# EAGLE board MachineLearning-MM-Carrier-Panel (EAGLE 9.5.2), part 1 of 4
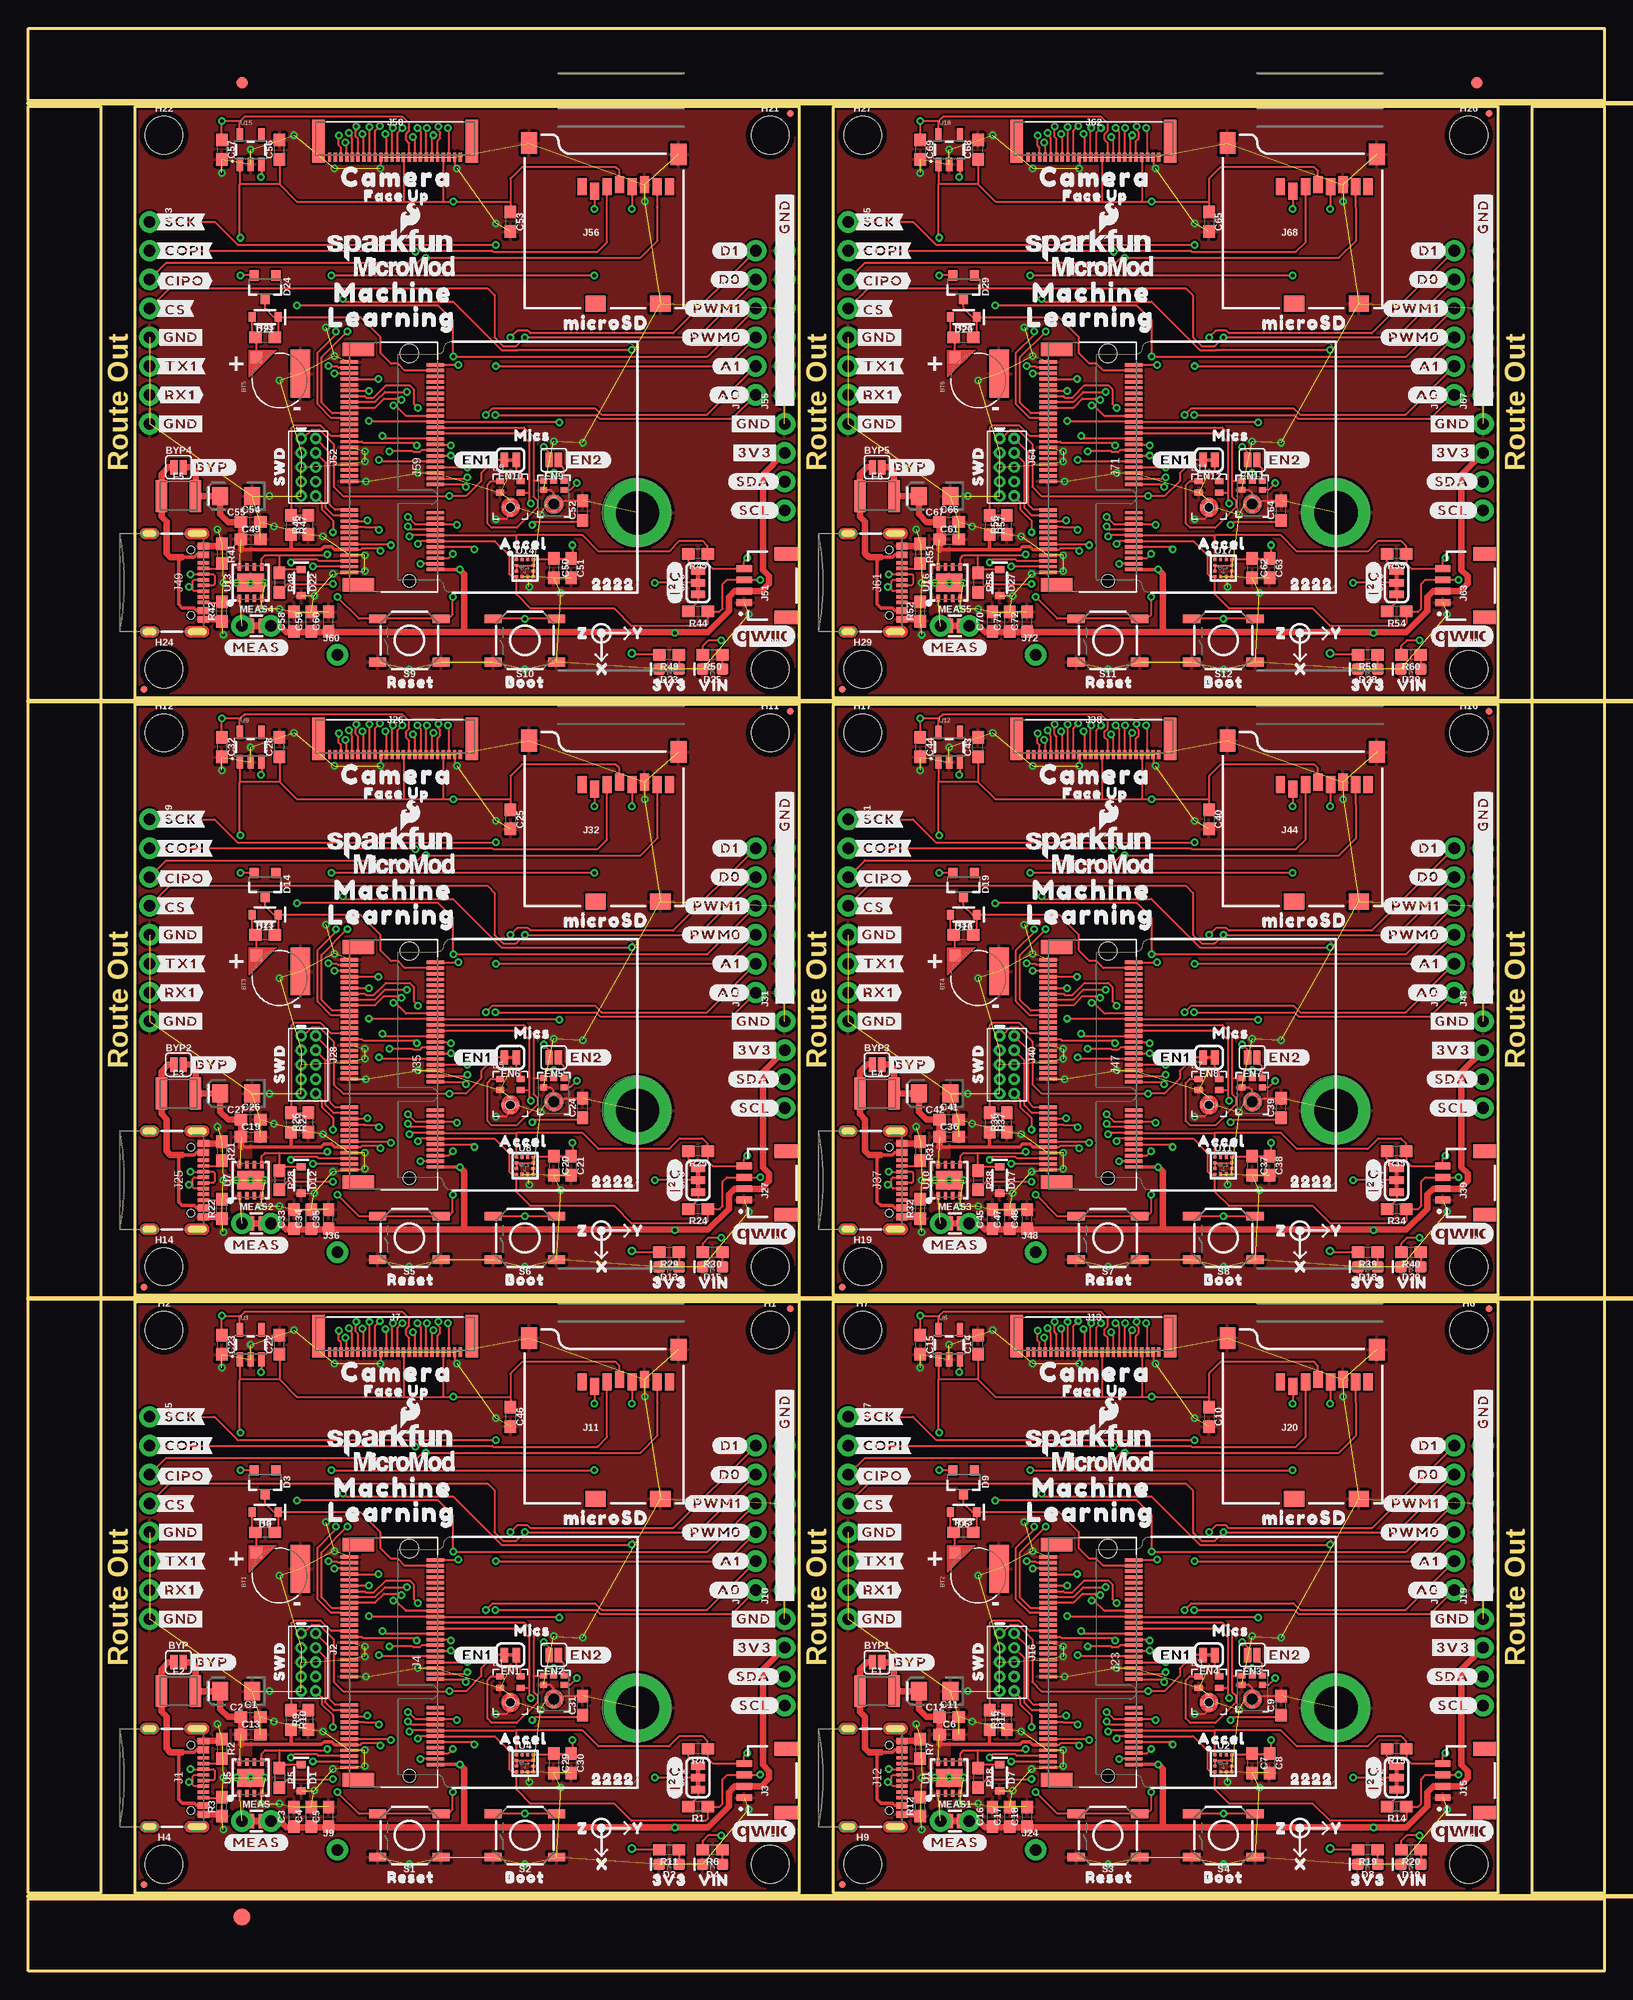
[diagram p0: board, top side]
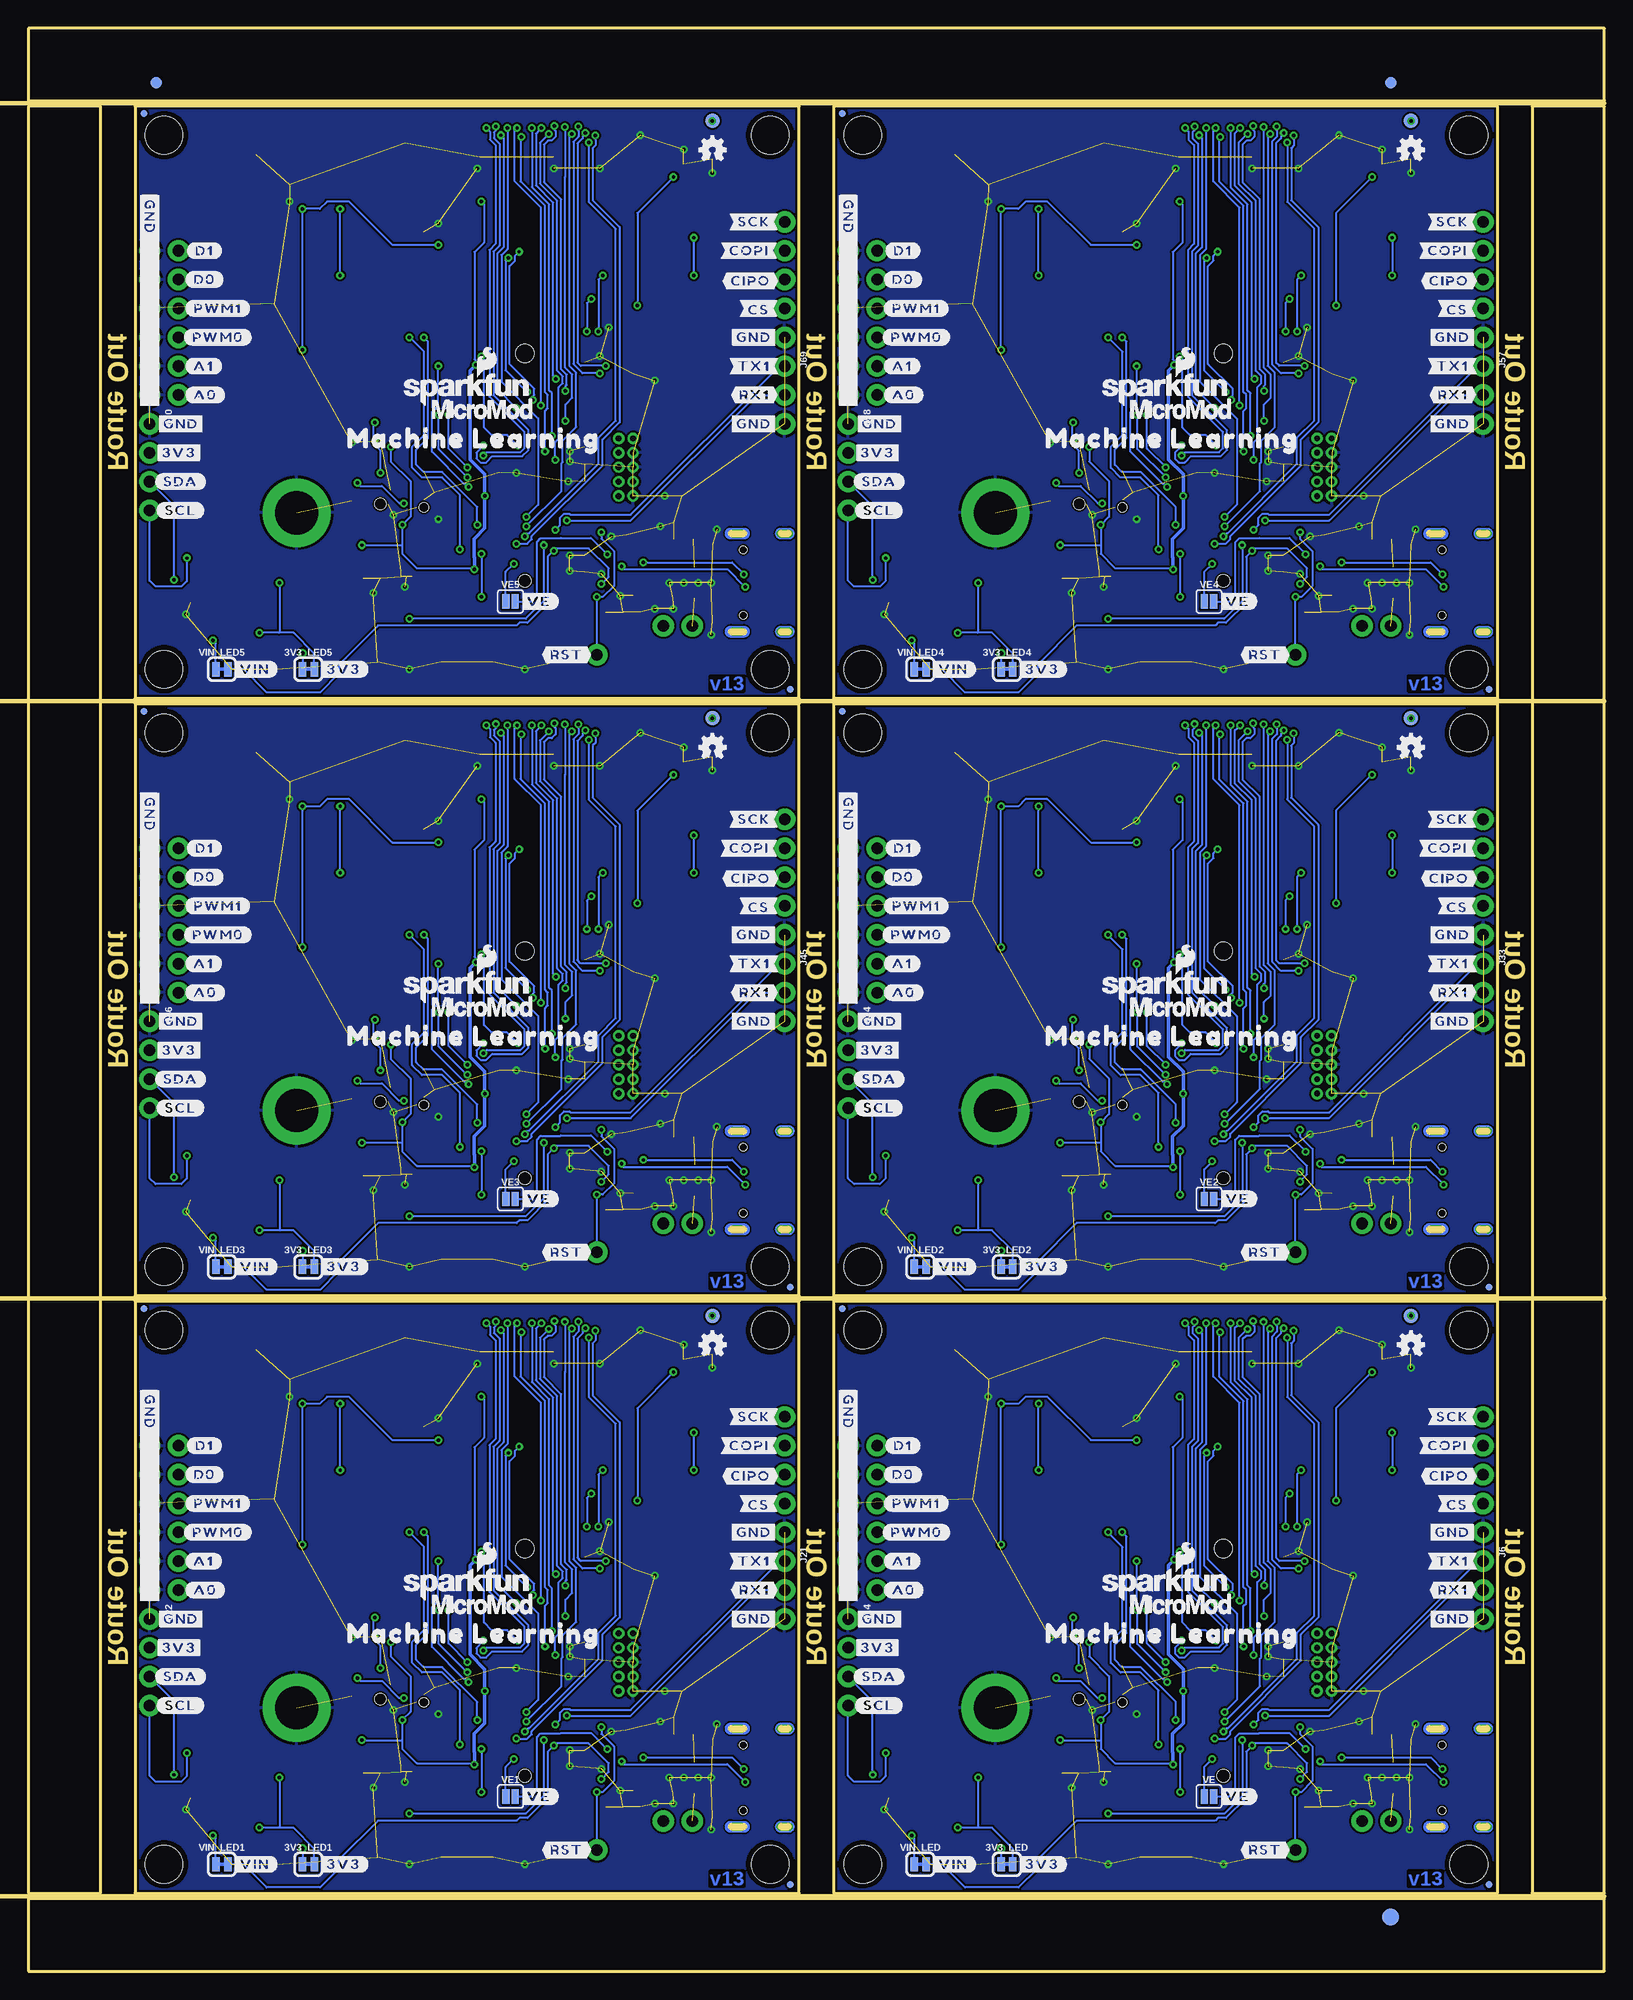
[diagram p1: board, bottom side, seen from below]

Size 138.68 x 170.94 mm. Coordinates in mm from the lower left corner, seen from the top.
Outline: 9.4,6.86 9.4,58.93 67.82,58.93 67.82,6.86 9.4,6.86
Outline: 70.87,6.86 70.87,58.93 129.29,58.93 129.29,6.86 70.87,6.86
Outline: 9.4,59.44 9.4,111.51 67.82,111.51 67.82,59.44 9.4,59.44
Outline: 70.87,59.44 70.87,111.51 129.29,111.51 129.29,59.44 70.87,59.44
Outline: 9.4,112.01 9.4,164.08 67.82,164.08 67.82,112.01 9.4,112.01
Outline: 70.87,112.01 70.87,164.08 129.29,164.08 129.29,112.01 70.87,112.01
Outline: 0,6.35 138.68,6.35 138.68,0 0,0 0,6.35
Outline: 132.33,164.08 138.68,164.08 138.68,6.86 132.33,6.86 132.33,164.08
Outline: 0,170.94 138.68,170.94 138.68,164.59 0,164.59 0,170.94
Outline: 0,164.08 6.35,164.08 6.35,6.86 0,6.86 0,164.08
Copper layers (1*16): Top 0.035mm / dielectric 1.5mm / Bottom 0.035mm
Design rules "MachineLearning-MM-Carrier": minimum track width 7mil, minimum drill 12mil, track to track 7mil, track to pad 7mil, pad to pad 7mil, via to via 7mil, smd to smd 7mil, copper to edge 7mil, drill to drill 7mil, minimum pad ring 7mil, minimum via ring 7mil, stop-mask expansion 4mil, vias tented up to drill 25mil, thermal gap 10mil
Net classes: 0 default: width 0 mm, drill 0 mm
Milling: 4 lines

## Footprints (pad centres in the part's own frame; a part is rotated, then mirrored left to right if it is on the bottom)
SMT-JUMPER_2_NC_TRACE_SILK = smd 0.66 x 1.27: 1 -0.521,0; 2 0.521,0
ML414H_IV01E = smd 1 x 1: + 2.022,2.032 | smd 4.2 x 1.7: - 0.6,-1.85
SMT-JUMPER_2_NO_SILK = smd 0.635 x 1.27: 1 -0.406,0; 2 0.406,0
0603 = smd 1.1 x 1: 1 -0.85,0; 2 0.85,0
EIA3216 = smd 1.4 x 1.6: + 1.4,0; - -1.4,0
SOD-323 = smd 0.63 x 0.83: A 1.15,0; C -1.15,0
LED-0603 = smd 1 x 1: A -0.877,0; C 0.877,0
SOT23-3 = smd 0.8 x 0.9: 1 -0.95,-1; 2 0.95,-1; 3 0,1.1
SPH0641LM4H-1_MICROPHONE = smd 0.725 x 0.522: 1 -0.9,1.3; 2 -0.9,0.3; 4 0.9,0.3; 5 0.9,1.3 | smd 0.5 x 0.2: 3 0,-1.65; 8 0,-0.35 | smd 0.2 x 0.5: 6 -0.65,-1; 7 0.65,-1 | hole 0.8: 0,-1
ICS-43434 = smd 0.522 x 0.6: 1 -1.364,-0.9; 2 -0.542,-0.9; 4 -0.542,0.9; 5 -1.364,0.9; 6 -1.364,0 | smd 0.2 x 0.5: 3 1.36,0; 8 0.06,0 | smd 0.5 x 0.2: 7 0.71,0.65; 9 0.71,-0.65 | hole 1: 0.71,0
FIDUCIAL-1X2 = smd 1 x 1: 1 0,0
FIDUCIAL-1.5X3 = smd 1.5 x 1.5: 1 0,0
1210 = smd 1 x 2.8: 1 -1.5,0; 2 1.5,0
FIDUCIAL-MICRO = smd 0.635 x 0.635: 1 0,0
STAND-OFF = hole 3.302: 0,0
STAND-OFF-REFLOW-M2.5 = drill 3.8 pad 6: 1 0,0
USB-C-16P-2LAYER-PADS = smd 0.3 x 1: A5 -1.25,-0.34; A6 -0.25,-0.34; A7 0.25,-0.34; A8 1.25,-0.34; B5 1.75,-0.34; B6 0.75,-0.34; B7 -0.75,-0.34; B8 -1.75,-0.34 | smd 0.6 x 1: GND -3.225,-0.34; GND2 3.225,-0.34; VBUS1 -2.45,-0.34; VBUS2 2.45,-0.34 | drill 0.4 pad 0.6 long: SHLD1 -4.318,-0.915; SHLD2 4.318,-0.915; SHLD3 -4.318,-5.095; SHLD4 4.318,-5.095 | hole 0.65: -2.89,-1.445; 2.89,-1.445
2X5-PTH-1.27MM = drill 0.508 pad 1: 1 -2.54,-0.635; 2 -2.54,0.635; 3 -1.27,-0.635; 4 -1.27,0.635; 5 0,-0.635; 6 0,0.635; 7 1.27,-0.635; 8 1.27,0.635; 9 2.54,-0.635; 10 2.54,0.635
JST04_1MM_RA = smd 0.6 x 1.35: 1 -1.5,0; 2 -0.5,0; 3 0.5,0; 4 1.5,0 | smd 1.2 x 2: NC1 2.8,-3.675; NC2 -2.8,-3.675
M.2-CONNECTOR-E = smd 0.3 x 1.55: 1 9.25,-5.275; 2 9,2.275; 3 8.75,-5.275; 4 8.5,2.275; 5 8.25,-5.275; 6 8,2.275; 7 7.75,-5.275; 8 7.5,2.275; 9 7.25,-5.275; 10 7,2.275; 11 6.75,-5.275; 12 6.5,2.275; 13 6.25,-5.275; 14 6,2.275; 15 5.75,-5.275; 16 5.5,2.275; 17 5.25,-5.275; 18 5,2.275; 19 4.75,-5.275; 20 4.5,2.275; 21 4.25,-5.275; 22 4,2.275; 23 3.75,-5.275; 32 1.5,2.275; 33 1.25,-5.275; 34 1,2.275; 35 0.75,-5.275; 36 0.5,2.275; 37 0.25,-5.275; 38 0,2.275; 39 -0.25,-5.275; 40 -0.5,2.275; 41 -0.75,-5.275; 42 -1,2.275; 43 -1.25,-5.275; 44 -1.5,2.275; 45 -1.75,-5.275; 46 -2,2.275; 47 -2.25,-5.275; 48 -2.5,2.275; 49 -2.75,-5.275; 50 -3,2.275; 51 -3.25,-5.275; 52 -3.5,2.275; 53 -3.75,-5.275; 54 -4,2.275; 55 -4.25,-5.275; 56 -4.5,2.275; 57 -4.75,-5.275; 58 -5,2.275; 59 -5.25,-5.275; 60 -5.5,2.275; 61 -5.75,-5.275; 62 -6,2.275; 63 -6.25,-5.275; 64 -6.5,2.275; 65 -6.75,-5.275; 66 -7,2.275; 67 -7.25,-5.275; 68 -7.5,2.275; 69 -7.75,-5.275; 70 -8,2.275; 71 -8.25,-5.275; 72 -8.5,2.275; 73 -8.75,-5.275; 74 -9,2.275; 75 -9.25,-5.275 | smd 1.2 x 2.75: A1 10.35,-4.5; A2 -10.35,-4.5 | hole 1.1: 10,0 | hole 1.6: -10,0
1X05_NO_SILK = drill 1.016 pad 1.88: 1 0,0; 2 2.54,0; 3 5.08,0; 4 7.62,0; 5 10.16,0
1X03_NO_SILK = drill 1.016 pad 1.88: 1 0,0; 2 2.54,0; 3 5.08,0
FPC05024-42201 = smd 0.3 x 0.8: 1 5.75,0.4; 2 5.25,0.4; 3 4.75,0.4; 4 4.25,0.4; 5 3.75,0.4; 6 3.25,0.4; 7 2.75,0.4; 8 2.25,0.4; 9 1.75,0.4; 10 1.25,0.4; 11 0.75,0.4; 12 0.25,0.4; 13 -0.25,0.4; 14 -0.75,0.4; 15 -1.25,0.4; 16 -1.75,0.4; 17 -2.25,0.4; 18 -2.75,0.4; 19 -3.25,0.4; 20 -3.75,0.4; 21 -4.25,0.4; 22 -4.75,0.4; 23 -5.25,0.4; 24 -5.75,0.4 | smd 1.1 x 3.75: MNT1 -6.75,-1; MNT2 6.75,-1
1X06_NO_SILK = drill 1.016 pad 1.88: 1 0,0; 2 2.54,0; 3 5.08,0; 4 7.62,0; 5 10.16,0; 6 12.7,0
1X01_NO_SILK = drill 1.016 pad 1.88: 1 0,0
MICRO-SD-SOCKET = smd 1.8 x 1.4: CD1 -2.05,0.4; CD2 -7.75,0.4 | smd 0.8 x 1.5: CS/DAT3 -7.84,10.3; DAT1 -1.24,10.7; DAT2 -8.94,10.7; DI/CMD -6.74,10.7; DO/DAT0 -2.34,10.7; GND -3.44,10.9; SCLK -4.54,10.7; VCC -5.64,10.9 | smd 1.4 x 1.9: GND1 -13.6,14.55; GND3 -0.45,13.55
1X04_NO_SILK = drill 1.016 pad 1.88: 1 0,0; 2 2.54,0; 3 5.08,0; 4 7.62,0
SMT-JUMPER_3_2-NC_TRACE_SILK = smd 0.66 x 1.27: 1 -1.041,0; 2 0,0; 3 1.041,0
COMBO-JUMPER_2_NC_TRACE = smd 0.635 x 1.27: 1 -0.508,0; 2 0.508,0 | drill 1.016 pad 1.88: 3 -1.27,0; 4 1.27,0
TACTILE_SWITCH_SMD_5.2MM = smd 1.524 x 0.762: 1 -2.794,1.905; 2 2.794,1.905; 3 -2.794,-1.905; 4 2.794,-1.905
PAD.03X.05 = smd 1.27 x 1.27: P$1 0,0
UDFN-8 = smd 0.3 x 0.65: 1 -0.975,-1.375; 2 -0.325,-1.375; 3 0.325,-1.375; 4 0.975,-1.375; 5 0.975,1.375; 6 0.325,1.375; 7 -0.325,1.375; 8 -0.975,1.375 | smd 2.35 x 1.6: EP 0,0
LGA-12-LISDH12 = smd 0.275 x 0.25: 1 -0.75,0.75; 2 -0.75,0.25; 3 -0.75,-0.25; 4 -0.75,-0.75; 7 0.75,-0.75; 8 0.75,-0.25; 9 0.75,0.25; 10 0.75,0.75 | smd 0.25 x 0.275: 5 -0.25,-0.75; 6 0.25,-0.75; 11 0.25,0.75; 12 -0.25,0.75
SOT23-5 = smd 0.55 x 1.2: 1 -0.95,-1.3; 2 0,-1.3; 3 0.95,-1.3; 4 0.95,1.3; 5 -0.95,1.3

## Placement (x,y rotation side)
3V3_LED  [SMT-JUMPER_2_NC_TRACE_SILK]  52.58,9.4 0 bottom
3V3_LED1  [SMT-JUMPER_2_NC_TRACE_SILK]  114.05,9.4 0 bottom
3V3_LED2  [SMT-JUMPER_2_NC_TRACE_SILK]  52.58,61.98 0 bottom
3V3_LED3  [SMT-JUMPER_2_NC_TRACE_SILK]  114.05,61.98 0 bottom
3V3_LED4  [SMT-JUMPER_2_NC_TRACE_SILK]  52.58,114.55 0 bottom
3V3_LED5  [SMT-JUMPER_2_NC_TRACE_SILK]  114.05,114.55 0 bottom
BT1  ML414H  [ML414H_IV01E]  22.1,34.8 90 top
BT2  ML414H  [ML414H_IV01E]  83.57,34.8 90 top
BT3  ML414H  [ML414H_IV01E]  22.1,87.38 90 top
BT4  ML414H  [ML414H_IV01E]  83.57,87.38 90 top
BT5  ML414H  [ML414H_IV01E]  22.1,139.95 90 top
BT6  ML414H  [ML414H_IV01E]  83.57,139.95 90 top
BYP  JUMPER-SMT_2_NO_SILK  [SMT-JUMPER_2_NO_SILK]  13.21,27.18 0 top
BYP1  JUMPER-SMT_2_NO_SILK  [SMT-JUMPER_2_NO_SILK]  74.68,27.18 0 top
BYP2  JUMPER-SMT_2_NO_SILK  [SMT-JUMPER_2_NO_SILK]  13.21,79.76 0 top
BYP3  JUMPER-SMT_2_NO_SILK  [SMT-JUMPER_2_NO_SILK]  74.68,79.76 0 top
BYP4  JUMPER-SMT_2_NO_SILK  [SMT-JUMPER_2_NO_SILK]  13.21,132.33 0 top
BYP5  JUMPER-SMT_2_NO_SILK  [SMT-JUMPER_2_NO_SILK]  74.68,132.33 0 top
C1  0.1uF  [0603]  19.56,22.35 0 top
C2  10uF  [EIA3216]  18.29,24.64 180 top
C3  1.0uF  [0603]  23.37,13.59 90 top
C4  0.1uF  [0603]  24.89,13.59 90 top
C5  0.22uF  [0603]  26.42,13.59 90 top
C6  0.22uF  [0603]  81.03,20.83 0 top
C7  1.0uF  [0603]  107.7,18.29 270 top
C8  0.1uF  [0603]  109.22,18.29 270 top
C9  0.1uF  [0603]  110.24,23.37 90 top
C10  0.1uF  [0603]  103.89,48.77 270 top
C11  0.1uF  [0603]  81.03,22.35 0 top
C12  10uF  [EIA3216]  79.76,24.64 180 top
C13  0.22uF  [0603]  19.56,20.83 0 top
C14  1.0uF  [0603]  83.57,55.12 90 top
C15  0.1uF  [0603]  78.49,55.12 270 top
C16  1.0uF  [0603]  84.84,13.59 90 top
C17  0.1uF  [0603]  86.36,13.59 90 top
C18  0.22uF  [0603]  87.88,13.59 90 top
C19  0.22uF  [0603]  19.56,73.41 0 top
C20  1.0uF  [0603]  46.23,70.87 270 top
C21  0.1uF  [0603]  47.75,70.87 270 top
C22  1.0uF  [0603]  22.1,55.12 90 top
C23  0.1uF  [0603]  17.02,55.12 270 top
C24  0.1uF  [0603]  48.77,75.95 90 top
C25  0.1uF  [0603]  42.42,101.35 270 top
C26  0.1uF  [0603]  19.56,74.93 0 top
C27  10uF  [EIA3216]  18.29,77.22 180 top
C28  1.0uF  [0603]  22.1,107.7 90 top
C29  1.0uF  [0603]  46.23,18.29 270 top
C30  0.1uF  [0603]  47.75,18.29 270 top
C31  0.1uF  [0603]  48.77,23.37 90 top
C32  0.1uF  [0603]  17.02,107.7 270 top
C33  1.0uF  [0603]  23.37,66.17 90 top
C34  0.1uF  [0603]  24.89,66.17 90 top
C35  0.22uF  [0603]  26.42,66.17 90 top
C36  0.22uF  [0603]  81.03,73.41 0 top
C37  1.0uF  [0603]  107.7,70.87 270 top
C38  0.1uF  [0603]  109.22,70.87 270 top
C39  0.1uF  [0603]  110.24,75.95 90 top
C40  0.1uF  [0603]  103.89,101.35 270 top
C41  0.1uF  [0603]  81.03,74.93 0 top
C42  10uF  [EIA3216]  79.76,77.22 180 top
C43  1.0uF  [0603]  83.57,107.7 90 top
C44  0.1uF  [0603]  78.49,107.7 270 top
C45  1.0uF  [0603]  84.84,66.17 90 top
C46  0.1uF  [0603]  42.42,48.77 270 top
C47  0.1uF  [0603]  86.36,66.17 90 top
C48  0.22uF  [0603]  87.88,66.17 90 top
C49  0.22uF  [0603]  19.56,125.98 0 top
C50  1.0uF  [0603]  46.23,123.44 270 top
C51  0.1uF  [0603]  47.75,123.44 270 top
C52  0.1uF  [0603]  48.77,128.52 90 top
C53  0.1uF  [0603]  42.42,153.92 270 top
C54  0.1uF  [0603]  19.56,127.51 0 top
C55  10uF  [EIA3216]  18.29,129.79 180 top
C56  1.0uF  [0603]  22.1,160.27 90 top
C57  0.1uF  [0603]  17.02,160.27 270 top
C58  1.0uF  [0603]  23.37,118.75 90 top
C59  0.1uF  [0603]  24.89,118.75 90 top
C60  0.22uF  [0603]  26.42,118.75 90 top
C61  0.22uF  [0603]  81.03,125.98 0 top
C62  1.0uF  [0603]  107.7,123.44 270 top
C63  0.1uF  [0603]  109.22,123.44 270 top
C64  0.1uF  [0603]  110.24,128.52 90 top
C65  0.1uF  [0603]  103.89,153.92 270 top
C66  0.1uF  [0603]  81.03,127.51 0 top
C67  10uF  [EIA3216]  79.76,129.79 180 top
C68  1.0uF  [0603]  83.57,160.27 90 top
C69  0.1uF  [0603]  78.49,160.27 270 top
C70  1.0uF  [0603]  84.84,118.75 90 top
C71  0.1uF  [0603]  86.36,118.75 90 top
C72  0.22uF  [0603]  87.88,118.75 90 top
D1  3.3V  [SOD-323]  24,17.02 270 top
D2  RED  [LED-0603]  56.39,9.4 180 top
D3  BAS70-05  [SOT23-3]  20.83,43.05 180 top
D4  Yellow  [LED-0603]  60.2,9.4 180 top
D5  3A/10V/280mV  [SOD-323]  82.3,40.39 180 top
D6  3A/10V/280mV  [SOD-323]  20.83,40.39 180 top
D7  3.3V  [SOD-323]  85.47,17.02 270 top
D8  RED  [LED-0603]  117.86,9.4 180 top
D9  BAS70-05  [SOT23-3]  82.3,43.05 180 top
D10  Yellow  [LED-0603]  121.67,9.4 180 top
D11  3A/10V/280mV  [SOD-323]  20.83,92.96 180 top
D12  3.3V  [SOD-323]  24,69.6 270 top
D13  RED  [LED-0603]  56.39,61.98 180 top
D14  BAS70-05  [SOT23-3]  20.83,95.63 180 top
D15  Yellow  [LED-0603]  60.2,61.98 180 top
D16  3A/10V/280mV  [SOD-323]  82.3,92.96 180 top
D17  3.3V  [SOD-323]  85.47,69.6 270 top
D18  RED  [LED-0603]  117.86,61.98 180 top
D19  BAS70-05  [SOT23-3]  82.3,95.63 180 top
D20  Yellow  [LED-0603]  121.67,61.98 180 top
D21  3A/10V/280mV  [SOD-323]  20.83,145.54 180 top
D22  3.3V  [SOD-323]  24,122.17 270 top
D23  RED  [LED-0603]  56.39,114.55 180 top
D24  BAS70-05  [SOT23-3]  20.83,148.21 180 top
D25  Yellow  [LED-0603]  60.2,114.55 180 top
D26  3A/10V/280mV  [SOD-323]  82.3,145.54 180 top
D27  3.3V  [SOD-323]  85.47,122.17 270 top
D28  RED  [LED-0603]  117.86,114.55 180 top
D29  BAS70-05  [SOT23-3]  82.3,148.21 180 top
D30  Yellow  [LED-0603]  121.67,114.55 180 top
E1  SPH0641LM4H-1  [SPH0641LM4H-1_MICROPHONE]  42.42,24.64 0 top
E2  ICS-43434  [ICS-43434]  46.23,24.64 270 top
E3  SPH0641LM4H-1  [SPH0641LM4H-1_MICROPHONE]  103.89,24.64 0 top
E4  ICS-43434  [ICS-43434]  107.7,24.64 270 top
E5  SPH0641LM4H-1  [SPH0641LM4H-1_MICROPHONE]  42.42,77.22 0 top
E6  ICS-43434  [ICS-43434]  46.23,77.22 270 top
E7  SPH0641LM4H-1  [SPH0641LM4H-1_MICROPHONE]  103.89,77.22 0 top
E8  ICS-43434  [ICS-43434]  107.7,77.22 270 top
E9  SPH0641LM4H-1  [SPH0641LM4H-1_MICROPHONE]  42.42,129.79 0 top
E10  ICS-43434  [ICS-43434]  46.23,129.79 270 top
E11  SPH0641LM4H-1  [SPH0641LM4H-1_MICROPHONE]  103.89,129.79 0 top
E12  ICS-43434  [ICS-43434]  107.7,129.79 270 top
E$1  [FIDUCIAL-1X2]  18.8,166.18 0 top
E$2  [FIDUCIAL-1X2]  18.8,166.18 0 bottom
E$3  [FIDUCIAL-1X2]  127.44,166.18 0 top
E$4  [FIDUCIAL-1X2]  127.44,166.18 0 bottom
E$5  [FIDUCIAL-1.5X3]  18.8,4.76 0 top
E$6  [FIDUCIAL-1.5X3]  18.8,4.76 0 bottom
EN1  [SMT-JUMPER_2_NC_TRACE_SILK]  42.42,27.81 180 top
EN2  [SMT-JUMPER_2_NO_SILK]  46.23,27.81 180 top
EN3  [SMT-JUMPER_2_NO_SILK]  107.7,27.81 180 top
EN4  [SMT-JUMPER_2_NC_TRACE_SILK]  103.89,27.81 180 top
EN5  [SMT-JUMPER_2_NO_SILK]  46.23,80.39 180 top
EN6  [SMT-JUMPER_2_NC_TRACE_SILK]  42.42,80.39 180 top
EN7  [SMT-JUMPER_2_NO_SILK]  107.7,80.39 180 top
EN8  [SMT-JUMPER_2_NC_TRACE_SILK]  103.89,80.39 180 top
EN9  [SMT-JUMPER_2_NO_SILK]  46.23,132.97 180 top
EN10  [SMT-JUMPER_2_NC_TRACE_SILK]  42.42,132.97 180 top
EN11  [SMT-JUMPER_2_NO_SILK]  107.7,132.97 180 top
EN12  [SMT-JUMPER_2_NC_TRACE_SILK]  103.89,132.97 180 top
F1  6V/2A  [1210]  74.68,24.64 0 top
F2  6V/2A  [1210]  13.21,24.64 0 top
F3  6V/2A  [1210]  13.21,77.22 0 top
F4  6V/2A  [1210]  74.68,77.22 0 top
F5  6V/2A  [1210]  13.21,129.79 0 top
F6  6V/2A  [1210]  74.68,129.79 0 top
FD1  FIDUCIALUFIDUCIAL  [FIDUCIAL-MICRO]  10.16,7.62 0 top
FD2  FIDUCIALUFIDUCIAL  [FIDUCIAL-MICRO]  67.06,58.29 0 top
FD3  FIDUCIALUFIDUCIAL  [FIDUCIAL-MICRO]  10.16,7.62 0 bottom
FD4  FIDUCIALUFIDUCIAL  [FIDUCIAL-MICRO]  67.06,58.29 0 bottom
FD5  FIDUCIALUFIDUCIAL  [FIDUCIAL-MICRO]  71.63,7.62 0 top
FD6  FIDUCIALUFIDUCIAL  [FIDUCIAL-MICRO]  128.52,58.29 0 top
FD7  FIDUCIALUFIDUCIAL  [FIDUCIAL-MICRO]  71.63,7.62 0 bottom
FD8  FIDUCIALUFIDUCIAL  [FIDUCIAL-MICRO]  128.52,58.29 0 bottom
FD9  FIDUCIALUFIDUCIAL  [FIDUCIAL-MICRO]  10.16,60.2 0 top
FD10  FIDUCIALUFIDUCIAL  [FIDUCIAL-MICRO]  67.06,110.87 0 top
FD11  FIDUCIALUFIDUCIAL  [FIDUCIAL-MICRO]  10.16,60.2 0 bottom
FD12  FIDUCIALUFIDUCIAL  [FIDUCIAL-MICRO]  67.06,110.87 0 bottom
FD13  FIDUCIALUFIDUCIAL  [FIDUCIAL-MICRO]  71.63,60.2 0 top
FD14  FIDUCIALUFIDUCIAL  [FIDUCIAL-MICRO]  128.52,110.87 0 top
FD15  FIDUCIALUFIDUCIAL  [FIDUCIAL-MICRO]  71.63,60.2 0 bottom
FD16  FIDUCIALUFIDUCIAL  [FIDUCIAL-MICRO]  128.52,110.87 0 bottom
FD17  FIDUCIALUFIDUCIAL  [FIDUCIAL-MICRO]  10.16,112.78 0 top
FD18  FIDUCIALUFIDUCIAL  [FIDUCIAL-MICRO]  67.06,163.45 0 top
FD19  FIDUCIALUFIDUCIAL  [FIDUCIAL-MICRO]  10.16,112.78 0 bottom
FD20  FIDUCIALUFIDUCIAL  [FIDUCIAL-MICRO]  67.06,163.45 0 bottom
FD21  FIDUCIALUFIDUCIAL  [FIDUCIAL-MICRO]  71.63,112.78 0 top
FD22  FIDUCIALUFIDUCIAL  [FIDUCIAL-MICRO]  128.52,163.45 0 top
FD23  FIDUCIALUFIDUCIAL  [FIDUCIAL-MICRO]  71.63,112.78 0 bottom
FD24  FIDUCIALUFIDUCIAL  [FIDUCIAL-MICRO]  128.52,163.45 0 bottom
H1  STAND-OFF  [STAND-OFF]  65.28,56.39 0 top
H2  STAND-OFF  [STAND-OFF]  11.94,56.39 0 top
H3  STAND-OFF  [STAND-OFF]  65.28,9.4 0 top
H4  STAND-OFF  [STAND-OFF]  11.94,9.4 0 top
H5  STAND-OFF-REFLOW2.5MM_TALL  [STAND-OFF-REFLOW-M2.5]  53.6,23.16 0 top
H6  STAND-OFF  [STAND-OFF]  126.75,56.39 0 top
H7  STAND-OFF  [STAND-OFF]  73.41,56.39 0 top
H8  STAND-OFF  [STAND-OFF]  126.75,9.4 0 top
H9  STAND-OFF  [STAND-OFF]  73.41,9.4 0 top
H10  STAND-OFF-REFLOW2.5MM_TALL  [STAND-OFF-REFLOW-M2.5]  115.07,23.16 0 top
H11  STAND-OFF  [STAND-OFF]  65.28,108.97 0 top
H12  STAND-OFF  [STAND-OFF]  11.94,108.97 0 top
H13  STAND-OFF  [STAND-OFF]  65.28,61.98 0 top
H14  STAND-OFF  [STAND-OFF]  11.94,61.98 0 top
H15  STAND-OFF-REFLOW2.5MM_TALL  [STAND-OFF-REFLOW-M2.5]  53.6,75.74 0 top
H16  STAND-OFF  [STAND-OFF]  126.75,108.97 0 top
H17  STAND-OFF  [STAND-OFF]  73.41,108.97 0 top
H18  STAND-OFF  [STAND-OFF]  126.75,61.98 0 top
H19  STAND-OFF  [STAND-OFF]  73.41,61.98 0 top
H20  STAND-OFF-REFLOW2.5MM_TALL  [STAND-OFF-REFLOW-M2.5]  115.07,75.74 0 top
H21  STAND-OFF  [STAND-OFF]  65.28,161.54 0 top
H22  STAND-OFF  [STAND-OFF]  11.94,161.54 0 top
H23  STAND-OFF  [STAND-OFF]  65.28,114.55 0 top
H24  STAND-OFF  [STAND-OFF]  11.94,114.55 0 top
H25  STAND-OFF-REFLOW2.5MM_TALL  [STAND-OFF-REFLOW-M2.5]  53.6,128.31 0 top
H26  STAND-OFF  [STAND-OFF]  126.75,161.54 0 top
H27  STAND-OFF  [STAND-OFF]  73.41,161.54 0 top
H28  STAND-OFF  [STAND-OFF]  126.75,114.55 0 top
H29  STAND-OFF  [STAND-OFF]  73.41,114.55 0 top
H30  STAND-OFF-REFLOW2.5MM_TALL  [STAND-OFF-REFLOW-M2.5]  115.07,128.31 0 top
J1  [USB-C-16P-2LAYER-PADS]  15.75,17.02 270 top
J2  JTAG  [2X5-PTH-1.27MM]  24.64,27.18 270 top
J3  QWIIC_RIGHT_ANGLE  [JST04_1MM_RA]  62.99,16.76 90 top
J4  MICROMOD-2222-C  [M.2-CONNECTOR-E]  33.53,27.18 270 top
J5  SPI  [1X05_NO_SILK]  10.67,48.77 270 top
J6  UART  [1X03_NO_SILK]  10.67,36.07 270 bottom
J7  CAMERA-HIMAXFACEUP  [FPC05024-42201]  32.26,54.86 180 top
J8  Dedicated  [1X06_NO_SILK]  64.01,33.53 90 top
J9  [1X01_NO_SILK]  27.18,10.67 0 top
J10  [1X06_NO_SILK]  66.55,33.53 90 top
J11  microSD  [MICRO-SD-SOCKET]  57.66,41.15 0 top
J12  [USB-C-16P-2LAYER-PADS]  77.22,17.02 270 top
J13  CAMERA-HIMAXFACEUP  [FPC05024-42201]  93.73,54.86 180 top
J14  [1X04_NO_SILK]  66.55,30.99 270 bottom
J15  QWIIC_RIGHT_ANGLE  [JST04_1MM_RA]  124.46,16.76 90 top
J16  JTAG  [2X5-PTH-1.27MM]  86.11,27.18 270 top
J17  SPI  [1X05_NO_SILK]  72.14,48.77 270 top
J18  Dedicated  [1X06_NO_SILK]  125.48,33.53 90 top
J19  [1X06_NO_SILK]  128.02,33.53 90 top
J20  microSD  [MICRO-SD-SOCKET]  119.13,41.15 0 top
J21  UART  [1X03_NO_SILK]  72.14,36.07 270 bottom
J22  [1X04_NO_SILK]  128.02,30.99 270 bottom
J23  MICROMOD-2222-C  [M.2-CONNECTOR-E]  95,27.18 270 top
J24  [1X01_NO_SILK]  88.65,10.67 0 top
J25  [USB-C-16P-2LAYER-PADS]  15.75,69.6 270 top
J26  CAMERA-HIMAXFACEUP  [FPC05024-42201]  32.26,107.44 180 top
J27  QWIIC_RIGHT_ANGLE  [JST04_1MM_RA]  62.99,69.34 90 top
J28  JTAG  [2X5-PTH-1.27MM]  24.64,79.76 270 top
J29  SPI  [1X05_NO_SILK]  10.67,101.35 270 top
J30  Dedicated  [1X06_NO_SILK]  64.01,86.11 90 top
J31  [1X06_NO_SILK]  66.55,86.11 90 top
J32  microSD  [MICRO-SD-SOCKET]  57.66,93.73 0 top
J33  UART  [1X03_NO_SILK]  10.67,88.65 270 bottom
J34  [1X04_NO_SILK]  66.55,83.57 270 bottom
J35  MICROMOD-2222-C  [M.2-CONNECTOR-E]  33.53,79.76 270 top
J36  [1X01_NO_SILK]  27.18,63.25 0 top
J37  [USB-C-16P-2LAYER-PADS]  77.22,69.6 270 top
J38  CAMERA-HIMAXFACEUP  [FPC05024-42201]  93.73,107.44 180 top
J39  QWIIC_RIGHT_ANGLE  [JST04_1MM_RA]  124.46,69.34 90 top
J40  JTAG  [2X5-PTH-1.27MM]  86.11,79.76 270 top
J41  SPI  [1X05_NO_SILK]  72.14,101.35 270 top
J42  Dedicated  [1X06_NO_SILK]  125.48,86.11 90 top
J43  [1X06_NO_SILK]  128.02,86.11 90 top
J44  microSD  [MICRO-SD-SOCKET]  119.13,93.73 0 top
J45  UART  [1X03_NO_SILK]  72.14,88.65 270 bottom
J46  [1X04_NO_SILK]  128.02,83.57 270 bottom
J47  MICROMOD-2222-C  [M.2-CONNECTOR-E]  95,79.76 270 top
J48  [1X01_NO_SILK]  88.65,63.25 0 top
J49  [USB-C-16P-2LAYER-PADS]  15.75,122.17 270 top
J50  CAMERA-HIMAXFACEUP  [FPC05024-42201]  32.26,160.02 180 top
J51  QWIIC_RIGHT_ANGLE  [JST04_1MM_RA]  62.99,121.92 90 top
J52  JTAG  [2X5-PTH-1.27MM]  24.64,132.33 270 top
J53  SPI  [1X05_NO_SILK]  10.67,153.92 270 top
J54  Dedicated  [1X06_NO_SILK]  64.01,138.68 90 top
J55  [1X06_NO_SILK]  66.55,138.68 90 top
J56  microSD  [MICRO-SD-SOCKET]  57.66,146.3 0 top
J57  UART  [1X03_NO_SILK]  10.67,141.22 270 bottom
J58  [1X04_NO_SILK]  66.55,136.14 270 bottom
J59  MICROMOD-2222-C  [M.2-CONNECTOR-E]  33.53,132.33 270 top
J60  [1X01_NO_SILK]  27.18,115.82 0 top
J61  [USB-C-16P-2LAYER-PADS]  77.22,122.17 270 top
J62  CAMERA-HIMAXFACEUP  [FPC05024-42201]  93.73,160.02 180 top
J63  QWIIC_RIGHT_ANGLE  [JST04_1MM_RA]  124.46,121.92 90 top
J64  JTAG  [2X5-PTH-1.27MM]  86.11,132.33 270 top
J65  SPI  [1X05_NO_SILK]  72.14,153.92 270 top
J66  Dedicated  [1X06_NO_SILK]  125.48,138.68 90 top
J67  [1X06_NO_SILK]  128.02,138.68 90 top
J68  microSD  [MICRO-SD-SOCKET]  119.13,146.3 0 top
J69  UART  [1X03_NO_SILK]  72.14,141.22 270 bottom
J70  [1X04_NO_SILK]  128.02,136.14 270 bottom
J71  MICROMOD-2222-C  [M.2-CONNECTOR-E]  95,132.33 270 top
J72  [1X01_NO_SILK]  88.65,115.82 0 top
JP1  [SMT-JUMPER_3_2-NC_TRACE_SILK]  58.93,17.02 90 top
JP2  [SMT-JUMPER_3_2-NC_TRACE_SILK]  120.4,17.02 90 top
JP3  [SMT-JUMPER_3_2-NC_TRACE_SILK]  58.93,69.6 90 top
JP4  [SMT-JUMPER_3_2-NC_TRACE_SILK]  120.4,69.6 90 top
JP5  [SMT-JUMPER_3_2-NC_TRACE_SILK]  58.93,122.17 90 top
JP6  [SMT-JUMPER_3_2-NC_TRACE_SILK]  120.4,122.17 90 top
LOGO1  SFE_LOGO_NAME_FLAME.1_INCH  [SFE_LOGO_NAME_FLAME_.1]  31.88,46.74 0 top
LOGO2  QWIIC_LOGO_CONNECTOR  [QWIIC_5.5MM]  64.71,12.32 0 top
LOGO3  OSHW-LOGOMINI  [OSHW-LOGO-MINI]  17.02,55.12 0 bottom
LOGO4  SFE_LOGO_NAME_FLAME.1_INCH  [SFE_LOGO_NAME_FLAME_.1]  38.61,34.04 0 bottom
LOGO5  SFE_LOGO_NAME_FLAME.1_INCH  [SFE_LOGO_NAME_FLAME_.1]  93.34,46.74 0 top
LOGO6  QWIIC_LOGO_CONNECTOR  [QWIIC_5.5MM]  126.17,12.32 0 top
LOGO7  OSHW-LOGOMINI  [OSHW-LOGO-MINI]  78.49,55.12 0 bottom
LOGO8  SFE_LOGO_NAME_FLAME.1_INCH  [SFE_LOGO_NAME_FLAME_.1]  100.08,34.04 0 bottom
LOGO9  SFE_LOGO_NAME_FLAME.1_INCH  [SFE_LOGO_NAME_FLAME_.1]  31.88,99.31 0 top
LOGO10  QWIIC_LOGO_CONNECTOR  [QWIIC_5.5MM]  64.71,64.9 0 top
LOGO11  OSHW-LOGOMINI  [OSHW-LOGO-MINI]  17.02,107.7 0 bottom
LOGO12  SFE_LOGO_NAME_FLAME.1_INCH  [SFE_LOGO_NAME_FLAME_.1]  38.61,86.61 0 bottom
LOGO13  SFE_LOGO_NAME_FLAME.1_INCH  [SFE_LOGO_NAME_FLAME_.1]  93.34,99.31 0 top
LOGO14  QWIIC_LOGO_CONNECTOR  [QWIIC_5.5MM]  126.17,64.9 0 top
LOGO15  OSHW-LOGOMINI  [OSHW-LOGO-MINI]  78.49,107.7 0 bottom
LOGO16  SFE_LOGO_NAME_FLAME.1_INCH  [SFE_LOGO_NAME_FLAME_.1]  100.08,86.61 0 bottom
LOGO17  SFE_LOGO_NAME_FLAME.1_INCH  [SFE_LOGO_NAME_FLAME_.1]  31.88,151.89 0 top
LOGO18  QWIIC_LOGO_CONNECTOR  [QWIIC_5.5MM]  64.71,117.48 0 top
LOGO19  OSHW-LOGOMINI  [OSHW-LOGO-MINI]  17.02,160.27 0 bottom
LOGO20  SFE_LOGO_NAME_FLAME.1_INCH  [SFE_LOGO_NAME_FLAME_.1]  38.61,139.19 0 bottom
LOGO21  SFE_LOGO_NAME_FLAME.1_INCH  [SFE_LOGO_NAME_FLAME_.1]  93.34,151.89 0 top
LOGO22  QWIIC_LOGO_CONNECTOR  [QWIIC_5.5MM]  126.17,117.48 0 top
LOGO23  OSHW-LOGOMINI  [OSHW-LOGO-MINI]  78.49,160.27 0 bottom
LOGO24  SFE_LOGO_NAME_FLAME.1_INCH  [SFE_LOGO_NAME_FLAME_.1]  100.08,139.19 0 bottom
MEAS  [COMBO-JUMPER_2_NC_TRACE]  20.07,13.21 0 top
MEAS1  [COMBO-JUMPER_2_NC_TRACE]  81.53,13.21 0 top
MEAS2  [COMBO-JUMPER_2_NC_TRACE]  20.07,65.79 0 top
MEAS3  [COMBO-JUMPER_2_NC_TRACE]  81.53,65.79 0 top
MEAS4  [COMBO-JUMPER_2_NC_TRACE]  20.07,118.36 0 top
MEAS5  [COMBO-JUMPER_2_NC_TRACE]  81.53,118.36 0 top
R1  2.2k  [0603]  58.93,14.48 180 top
R2  5.1k  [0603]  17.02,19.56 270 top
R3  5.1k  [0603]  17.02,14.48 90 top
R4  2.2k  [0603]  58.93,19.56 180 top
R5  100k  [0603]  22.1,17.02 270 top
R6  4.7k  [0603]  60.2,10.67 180 top
R7  5.1k  [0603]  78.49,19.56 270 top
R8  3.3k  [0603]  20.83,38.61 0 top
R9  10k  [0603]  24.64,22.1 90 top
R10  20k  [0603]  23.11,22.1 270 top
R11  1k  [0603]  56.39,10.67 180 top
R12  5.1k  [0603]  78.49,14.48 90 top
R13  3.3k  [0603]  82.3,38.61 0 top
R14  2.2k  [0603]  120.4,14.48 180 top
R15  2.2k  [0603]  120.4,19.56 180 top
R16  10k  [0603]  86.11,22.1 90 top
R17  20k  [0603]  84.58,22.1 270 top
R18  100k  [0603]  83.57,17.02 270 top
R19  1k  [0603]  117.86,10.67 180 top
R20  4.7k  [0603]  121.67,10.67 180 top
R21  5.1k  [0603]  17.02,72.14 270 top
R22  5.1k  [0603]  17.02,67.06 90 top
R23  3.3k  [0603]  20.83,91.19 0 top
R24  2.2k  [0603]  58.93,67.06 180 top
R25  2.2k  [0603]  58.93,72.14 180 top
R26  10k  [0603]  24.64,74.68 90 top
R27  20k  [0603]  23.11,74.68 270 top
R28  100k  [0603]  22.1,69.6 270 top
R29  1k  [0603]  56.39,63.25 180 top
R30  4.7k  [0603]  60.2,63.25 180 top
R31  5.1k  [0603]  78.49,72.14 270 top
R32  5.1k  [0603]  78.49,67.06 90 top
R33  3.3k  [0603]  82.3,91.19 0 top
R34  2.2k  [0603]  120.4,67.06 180 top
R35  2.2k  [0603]  120.4,72.14 180 top
R36  10k  [0603]  86.11,74.68 90 top
R37  20k  [0603]  84.58,74.68 270 top
R38  100k  [0603]  83.57,69.6 270 top
R39  1k  [0603]  117.86,63.25 180 top
R40  4.7k  [0603]  121.67,63.25 180 top
R41  5.1k  [0603]  17.02,124.71 270 top
R42  5.1k  [0603]  17.02,119.63 90 top
R43  3.3k  [0603]  20.83,143.76 0 top
R44  2.2k  [0603]  58.93,119.63 180 top
R45  2.2k  [0603]  58.93,124.71 180 top
R46  10k  [0603]  24.64,127.25 90 top
R47  20k  [0603]  23.11,127.25 270 top
R48  100k  [0603]  22.1,122.17 270 top
R49  1k  [0603]  56.39,115.82 180 top
R50  4.7k  [0603]  60.2,115.82 180 top
R51  5.1k  [0603]  78.49,124.71 270 top
R52  5.1k  [0603]  78.49,119.63 90 top
R53  3.3k  [0603]  82.3,143.76 0 top
R54  2.2k  [0603]  120.4,119.63 180 top
R55  2.2k  [0603]  120.4,124.71 180 top
R56  10k  [0603]  86.11,127.25 90 top
R57  20k  [0603]  84.58,127.25 270 top
R58  100k  [0603]  83.57,122.17 270 top
R59  1k  [0603]  117.86,115.82 180 top
R60  4.7k  [0603]  121.67,115.82 180 top
S1  Reset  [TACTILE_SWITCH_SMD_5.2MM]  33.53,11.94 180 top
S2  BOOT  [TACTILE_SWITCH_SMD_5.2MM]  43.69,11.94 180 top
S3  Reset  [TACTILE_SWITCH_SMD_5.2MM]  95,11.94 180 top
S4  BOOT  [TACTILE_SWITCH_SMD_5.2MM]  105.16,11.94 180 top
S5  Reset  [TACTILE_SWITCH_SMD_5.2MM]  33.53,64.52 180 top
S6  BOOT  [TACTILE_SWITCH_SMD_5.2MM]  43.69,64.52 180 top
S7  Reset  [TACTILE_SWITCH_SMD_5.2MM]  95,64.52 180 top
S8  BOOT  [TACTILE_SWITCH_SMD_5.2MM]  105.16,64.52 180 top
S9  Reset  [TACTILE_SWITCH_SMD_5.2MM]  33.53,117.09 180 top
S10  BOOT  [TACTILE_SWITCH_SMD_5.2MM]  43.69,117.09 180 top
S11  Reset  [TACTILE_SWITCH_SMD_5.2MM]  95,117.09 180 top
S12  BOOT  [TACTILE_SWITCH_SMD_5.2MM]  105.16,117.09 180 top
TP1  TEST-POINT3X5  [PAD.03X.05]  78.49,57.66 0 bottom
TP2  TEST-POINT3X5  [PAD.03X.05]  17.02,110.24 0 bottom
TP3  TEST-POINT3X5  [PAD.03X.05]  78.49,110.24 0 bottom
TP4  TEST-POINT3X5  [PAD.03X.05]  17.02,162.81 0 bottom
TP5  TEST-POINT3X5  [PAD.03X.05]  78.49,162.81 0 bottom
TP7  TEST-POINT3X5  [PAD.03X.05]  17.02,57.66 0 bottom
U1  AP7361C-33FGE  [UDFN-8]  81.03,17.02 0 top
U2  LIS2DH12  [LGA-12-LISDH12]  105.16,18.29 0 top
U3  AP2127K-1.8V  [SOT23-5]  19.56,55.12 0 top
U4  LIS2DH12  [LGA-12-LISDH12]  43.69,18.29 0 top
U5  AP7361C-33FGE  [UDFN-8]  19.56,17.02 0 top
U6  AP2127K-1.8V  [SOT23-5]  81.03,55.12 0 top
U7  AP7361C-33FGE  [UDFN-8]  19.56,69.6 0 top
U8  LIS2DH12  [LGA-12-LISDH12]  43.69,70.87 0 top
U9  AP2127K-1.8V  [SOT23-5]  19.56,107.7 0 top
U10  AP7361C-33FGE  [UDFN-8]  81.03,69.6 0 top
U11  LIS2DH12  [LGA-12-LISDH12]  105.16,70.87 0 top
U12  AP2127K-1.8V  [SOT23-5]  81.03,107.7 0 top
U13  AP7361C-33FGE  [UDFN-8]  19.56,122.17 0 top
U14  LIS2DH12  [LGA-12-LISDH12]  43.69,123.44 0 top
U15  AP2127K-1.8V  [SOT23-5]  19.56,160.27 0 top
U16  AP7361C-33FGE  [UDFN-8]  81.03,122.17 0 top
U17  LIS2DH12  [LGA-12-LISDH12]  105.16,123.44 0 top
U18  AP2127K-1.8V  [SOT23-5]  81.03,160.27 0 top
U$1  [#EN1#3]  37.47,27.81 0 top
U$2  [#EN2#4]  46.99,27.81 0 top
U$3  [CAMERA0]  26.29,52.7 0 top
U$4  [#3V3#0]  51.69,9.4 0 bottom
U$5  [MICS0]  42.04,29.97 0 top
U$6  [#A0#5]  59.94,33.53 0 top
U$7  [#A0#5]  63.37,33.53 0 bottom
U$8  [#A1#4]  60.2,36.07 0 top
U$9  [#A1#4]  63.37,36.07 0 bottom
U$10  [#D0#1]  63.37,43.69 0 bottom
U$11  [#GND#0]  66.55,46.99 90 top
U$12  [#GND#0]  66.55,51.43 270 bottom
U$13  [#3V3#1]  61.72,28.45 0 top
U$14  [#3V3#1]  66.17,28.45 0 bottom
U$15  [#GND#0]  61.59,30.99 0 top
U$16  [#GND#0]  66.04,30.99 0 bottom
U$17  [#RST#1]  32,10.67 0 bottom
U$18  [#VE#0]  34.04,15.37 0 bottom
U$19  [#MEAS#2]  17.27,11.3 0 top
U$20  [#VIN#1]  59.31,9.4 0 bottom
U$21  [SWD0]  22.1,24.89 90 top
U$22  [FACE_UP0]  28.83,51.05 0 top
U$23  [#I�C#0]  56.9,15.24 90 top
U$24  [MICROMOD_LOGO_.35]  33.02,44.83 0 top
U$25  [#D0#1]  60.07,43.69 0 top
U$26  [MACHINE0]  25.65,42.54 0 top
U$27  [LEARNING1]  25.15,40.39 0 top
U$28  [MICROSD0]  46.23,39.88 0 top
U$29  [#D1#0]  60.2,46.23 0 top
U$30  [LEARNING1]  39.37,29.72 0 bottom
U$31  [#D1#0]  63.25,46.23 0 bottom
U$32  [#PWM0#3]  57.53,38.61 0 top
U$33  [#BYP#1]  13.97,27.18 0 top
U$34  [MICROMOD_LOGO_.35]  37.34,32.26 0 bottom
U$35  [##CS##3]  11.3,41.15 0 top
U$36  [3V37]  54.23,8 0 top
U$37  [MACHINE0]  50.42,29.72 0 bottom
U$38  [22223]  48.89,16.89 0 top
U$39  [ACCEL4]  40.77,20.45 0 top
U$40  [BOOT5]  41.27,8.25 0 top
U$41  [#PWM0#3]  63.5,38.61 0 bottom
U$42  [#PWM1#2]  57.78,41.15 0 top
U$43  [#SCL#3]  61.85,23.37 0 top
U$44  [#SCL#3]  65.91,23.37 0 bottom
U$45  [RESET6]  30.86,8.25 0 top
U$46  [VIN8]  58.29,8 0 top
U$47  [X1]  49.28,9.4 0 top
U$48  [Y2]  52.45,12.57 0 top
U$49  [#PWM1#2]  63.37,41.15 0 bottom
U$50  [#SDA#2]  61.59,25.91 0 top
U$51  [#SDA#2]  66.04,25.91 0 bottom
U$52  [Z0]  47.62,12.57 0 top
U$53  [MICROMOD_LOGO_.35]  94.49,44.83 0 top
U$54  [MICROMOD_LOGO_.35]  98.81,32.26 0 bottom
U$55  [##CS##3]  72.77,41.15 0 top
U$56  [##CS##3]  76.07,41.15 0 bottom
U$57  [#CIPO#2]  77.6,43.56 0 bottom
U$58  [#CIPO#2]  72.77,43.56 0 top
U$59  [#COPI#1]  72.77,46.23 0 top
U$60  [#COPI#1]  77.72,46.23 0 bottom
U$61  [#GND#4]  72.64,38.61 0 top
U$62  [#GND#4]  77.09,38.61 0 bottom
U$63  [#RX1#6]  72.77,33.53 0 top
U$64  [#RX1#6]  76.83,33.53 0 bottom
U$65  [#SCK#0]  72.77,48.77 0 top
U$66  [#SCK#0]  76.96,48.77 0 bottom
U$67  [#TX1#5]  72.77,36.07 0 top
U$68  [##CS##3]  14.61,41.15 0 bottom
U$69  [#CIPO#2]  16.13,43.56 0 bottom
U$70  [#CIPO#2]  11.3,43.56 0 top
U$71  [#COPI#1]  11.3,46.23 0 top
U$72  [#COPI#1]  16.26,46.23 0 bottom
U$73  [#GND#4]  11.18,38.61 0 top
U$74  [#GND#4]  15.62,38.61 0 bottom
U$75  [#RX1#6]  11.3,33.53 0 top
U$76  [#RX1#6]  15.37,33.53 0 bottom
U$77  [#SCK#0]  11.3,48.77 0 top
U$78  [#SCK#0]  15.49,48.77 0 bottom
U$79  [#TX1#5]  11.3,36.07 0 top
U$80  [#TX1#5]  15.49,36.07 0 bottom
U$81  [#GND#4]  11.18,30.99 0 top
U$82  [#GND#4]  15.62,30.99 0 bottom
U$83  [#TX1#5]  76.96,36.07 0 bottom
U$84  [#GND#4]  72.64,30.99 0 top
U$85  [#GND#4]  77.09,30.99 0 bottom
U$86  [#A0#5]  121.41,33.53 0 top
U$87  [#A0#5]  124.84,33.53 0 bottom
U$88  [#A1#4]  121.67,36.07 0 top
U$89  [#A1#4]  124.84,36.07 0 bottom
U$90  [#D0#1]  124.84,43.69 0 bottom
U$91  [#D0#1]  121.54,43.69 0 top
U$92  [#D1#0]  121.67,46.23 0 top
U$93  [#D1#0]  124.71,46.23 0 bottom
U$94  [#PWM0#3]  119,38.61 0 top
U$95  [#PWM0#3]  124.97,38.61 0 bottom
U$96  [#PWM1#2]  119.25,41.15 0 top
U$97  [#PWM1#2]  124.84,41.15 0 bottom
U$98  [#GND#0]  128.02,46.99 90 top
U$99  [#GND#0]  128.02,51.43 270 bottom
U$100  [#3V3#1]  123.19,28.45 0 top
U$101  [#3V3#1]  127.63,28.45 0 bottom
U$102  [#GND#0]  123.06,30.99 0 top
U$103  [#GND#0]  127.51,30.99 0 bottom
U$104  [#SCL#3]  123.32,23.37 0 top
U$105  [#SCL#3]  127.38,23.37 0 bottom
U$106  [#SDA#2]  123.06,25.91 0 top
U$107  [#SDA#2]  127.51,25.91 0 bottom
U$108  [3V37]  115.7,8 0 top
U$109  [22223]  110.36,16.89 0 top
U$110  [ACCEL4]  102.23,20.45 0 top
U$111  [BOOT5]  102.74,8.25 0 top
U$112  [RESET6]  92.33,8.25 0 top
U$113  [VIN8]  119.76,8 0 top
U$114  [X1]  110.74,9.4 0 top
U$115  [Y2]  113.92,12.57 0 top
U$116  [Z0]  109.09,12.57 0 top
U$117  [#EN1#3]  98.93,27.81 0 top
U$118  [#EN2#4]  108.46,27.81 0 top
U$119  [#MEAS#2]  78.74,11.3 0 top
U$120  [SWD0]  83.57,24.89 90 top
U$121  [#BYP#1]  75.44,27.18 0 top
U$122  [MICS0]  103.5,29.97 0 top
U$123  [#RST#1]  93.47,10.67 0 bottom
U$124  [#VE#0]  95.5,15.37 0 bottom
U$125  [#I�C#0]  118.36,15.24 90 top
U$126  [MACHINE0]  87.12,42.54 0 top
U$127  [LEARNING1]  86.61,40.39 0 top
U$128  [CAMERA0]  87.76,52.7 0 top
U$129  [FACE_UP0]  90.3,51.05 0 top
U$130  [#3V3#0]  113.16,9.4 0 bottom
U$131  [#VIN#1]  120.78,9.4 0 bottom
U$132  [MICROSD0]  107.7,39.88 0 top
U$133  [LEARNING1]  100.84,29.72 0 bottom
U$134  [MACHINE0]  111.89,29.72 0 bottom
U$135  [MICROMOD_LOGO_.35]  33.02,97.41 0 top
U$136  [MICROMOD_LOGO_.35]  37.34,84.84 0 bottom
U$137  [##CS##3]  11.3,93.73 0 top
U$138  [##CS##3]  14.61,93.73 0 bottom
U$139  [#CIPO#2]  16.13,96.14 0 bottom
U$140  [#CIPO#2]  11.3,96.14 0 top
U$141  [#COPI#1]  11.3,98.81 0 top
U$142  [#COPI#1]  16.26,98.81 0 bottom
U$143  [#GND#4]  11.18,91.19 0 top
U$144  [#GND#4]  15.62,91.19 0 bottom
U$145  [#RX1#6]  11.3,86.11 0 top
U$146  [#RX1#6]  15.37,86.11 0 bottom
U$147  [#SCK#0]  11.3,101.35 0 top
U$148  [#SCK#0]  15.49,101.35 0 bottom
U$149  [#TX1#5]  11.3,88.65 0 top
U$150  [#TX1#5]  15.49,88.65 0 bottom
U$151  [#GND#4]  11.18,83.57 0 top
U$152  [#GND#4]  15.62,83.57 0 bottom
U$153  [#A0#5]  59.94,86.11 0 top
U$154  [#A0#5]  63.37,86.11 0 bottom
U$155  [#A1#4]  60.2,88.65 0 top
U$156  [#A1#4]  63.37,88.65 0 bottom
U$157  [#D0#1]  63.37,96.27 0 bottom
U$158  [#D0#1]  60.07,96.27 0 top
U$159  [#D1#0]  60.2,98.81 0 top
U$160  [#D1#0]  63.25,98.81 0 bottom
U$161  [#PWM0#3]  57.53,91.19 0 top
U$162  [#PWM0#3]  63.5,91.19 0 bottom
U$163  [#PWM1#2]  57.78,93.73 0 top
U$164  [#PWM1#2]  63.37,93.73 0 bottom
U$165  [#GND#0]  66.55,99.57 90 top
U$166  [#GND#0]  66.55,104.01 270 bottom
U$167  [#3V3#1]  61.72,81.03 0 top
U$168  [#3V3#1]  66.17,81.03 0 bottom
U$169  [#GND#0]  61.59,83.57 0 top
U$170  [#GND#0]  66.04,83.57 0 bottom
U$171  [#SCL#3]  61.85,75.95 0 top
U$172  [#SCL#3]  65.91,75.95 0 bottom
U$173  [#SDA#2]  61.59,78.49 0 top
U$174  [#SDA#2]  66.04,78.49 0 bottom
U$175  [3V37]  54.23,60.58 0 top
U$176  [22223]  48.89,69.47 0 top
U$177  [ACCEL4]  40.77,73.03 0 top
U$178  [BOOT5]  41.27,60.83 0 top
U$179  [RESET6]  30.86,60.83 0 top
U$180  [VIN8]  58.29,60.58 0 top
U$181  [X1]  49.28,61.98 0 top
U$182  [Y2]  52.45,65.15 0 top
U$183  [Z0]  47.62,65.15 0 top
U$184  [#EN1#3]  37.47,80.39 0 top
U$185  [#EN2#4]  46.99,80.39 0 top
U$186  [#MEAS#2]  17.27,63.88 0 top
U$187  [SWD0]  22.1,77.47 90 top
U$188  [#BYP#1]  13.97,79.76 0 top
U$189  [MICS0]  42.04,82.55 0 top
U$190  [#RST#1]  32,63.25 0 bottom
U$191  [#VE#0]  34.04,67.95 0 bottom
U$192  [#I�C#0]  56.9,67.82 90 top
U$193  [MACHINE0]  25.65,95.12 0 top
U$194  [LEARNING1]  25.15,92.96 0 top
U$195  [CAMERA0]  26.29,105.28 0 top
U$196  [FACE_UP0]  28.83,103.63 0 top
U$197  [#3V3#0]  51.69,61.98 0 bottom
U$198  [#VIN#1]  59.31,61.98 0 bottom
U$199  [MICROSD0]  46.23,92.46 0 top
U$200  [LEARNING1]  39.37,82.3 0 bottom
U$201  [MACHINE0]  50.42,82.3 0 bottom
U$202  [MICROMOD_LOGO_.35]  94.49,97.41 0 top
U$203  [MICROMOD_LOGO_.35]  98.81,84.84 0 bottom
U$204  [##CS##3]  72.77,93.73 0 top
U$205  [##CS##3]  76.07,93.73 0 bottom
U$206  [#CIPO#2]  77.6,96.14 0 bottom
U$207  [#CIPO#2]  72.77,96.14 0 top
U$208  [#COPI#1]  72.77,98.81 0 top
U$209  [#COPI#1]  77.72,98.81 0 bottom
U$210  [#GND#4]  72.64,91.19 0 top
U$211  [#GND#4]  77.09,91.19 0 bottom
U$212  [#RX1#6]  72.77,86.11 0 top
U$213  [#RX1#6]  76.83,86.11 0 bottom
U$214  [#SCK#0]  72.77,101.35 0 top
U$215  [#SCK#0]  76.96,101.35 0 bottom
U$216  [#TX1#5]  72.77,88.65 0 top
U$217  [#TX1#5]  76.96,88.65 0 bottom
U$218  [#GND#4]  72.64,83.57 0 top
U$219  [#GND#4]  77.09,83.57 0 bottom
U$220  [#A0#5]  121.41,86.11 0 top
U$221  [#A0#5]  124.84,86.11 0 bottom
U$222  [#A1#4]  121.67,88.65 0 top
U$223  [#A1#4]  124.84,88.65 0 bottom
U$224  [#D0#1]  124.84,96.27 0 bottom
U$225  [#D0#1]  121.54,96.27 0 top
U$226  [#D1#0]  121.67,98.81 0 top
U$227  [#D1#0]  124.71,98.81 0 bottom
U$228  [#PWM0#3]  119,91.19 0 top
U$229  [#PWM0#3]  124.97,91.19 0 bottom
U$230  [#PWM1#2]  119.25,93.73 0 top
U$231  [#PWM1#2]  124.84,93.73 0 bottom
U$232  [#GND#0]  128.02,99.57 90 top
U$233  [#GND#0]  128.02,104.01 270 bottom
U$234  [#3V3#1]  123.19,81.03 0 top
U$235  [#3V3#1]  127.63,81.03 0 bottom
U$236  [#GND#0]  123.06,83.57 0 top
U$237  [#GND#0]  127.51,83.57 0 bottom
U$238  [#SCL#3]  123.32,75.95 0 top
U$239  [#SCL#3]  127.38,75.95 0 bottom
U$240  [#SDA#2]  123.06,78.49 0 top
U$241  [#SDA#2]  127.51,78.49 0 bottom
U$242  [3V37]  115.7,60.58 0 top
U$243  [22223]  110.36,69.47 0 top
U$244  [ACCEL4]  102.23,73.03 0 top
U$245  [BOOT5]  102.74,60.83 0 top
U$246  [RESET6]  92.33,60.83 0 top
U$247  [VIN8]  119.76,60.58 0 top
U$248  [X1]  110.74,61.98 0 top
U$249  [Y2]  113.92,65.15 0 top
U$250  [Z0]  109.09,65.15 0 top
U$251  [#EN1#3]  98.93,80.39 0 top
U$252  [#EN2#4]  108.46,80.39 0 top
U$253  [#MEAS#2]  78.74,63.88 0 top
U$254  [SWD0]  83.57,77.47 90 top
U$255  [#BYP#1]  75.44,79.76 0 top
U$256  [MICS0]  103.5,82.55 0 top
U$257  [#RST#1]  93.47,63.25 0 bottom
U$258  [#VE#0]  95.5,67.95 0 bottom
U$259  [#I�C#0]  118.36,67.82 90 top
U$260  [MACHINE0]  87.12,95.12 0 top
U$261  [LEARNING1]  86.61,92.96 0 top
U$262  [CAMERA0]  87.76,105.28 0 top
U$263  [FACE_UP0]  90.3,103.63 0 top
U$264  [#3V3#0]  113.16,61.98 0 bottom
U$265  [#VIN#1]  120.78,61.98 0 bottom
U$266  [MICROSD0]  107.7,92.46 0 top
U$267  [LEARNING1]  100.84,82.3 0 bottom
U$268  [MACHINE0]  111.89,82.3 0 bottom
U$269  [MICROMOD_LOGO_.35]  33.02,149.99 0 top
U$270  [MICROMOD_LOGO_.35]  37.34,137.41 0 bottom
U$271  [##CS##3]  11.3,146.3 0 top
U$272  [##CS##3]  14.61,146.3 0 bottom
U$273  [#CIPO#2]  16.13,148.72 0 bottom
U$274  [#CIPO#2]  11.3,148.72 0 top
U$275  [#COPI#1]  11.3,151.38 0 top
U$276  [#COPI#1]  16.26,151.38 0 bottom
U$277  [#GND#4]  11.18,143.76 0 top
U$278  [#GND#4]  15.62,143.76 0 bottom
U$279  [#RX1#6]  11.3,138.68 0 top
U$280  [#RX1#6]  15.37,138.68 0 bottom
U$281  [#SCK#0]  11.3,153.92 0 top
U$282  [#SCK#0]  15.49,153.92 0 bottom
U$283  [#TX1#5]  11.3,141.22 0 top
U$284  [#TX1#5]  15.49,141.22 0 bottom
U$285  [#GND#4]  11.18,136.14 0 top
U$286  [#GND#4]  15.62,136.14 0 bottom
U$287  [#A0#5]  59.94,138.68 0 top
U$288  [#A0#5]  63.37,138.68 0 bottom
U$289  [#A1#4]  60.2,141.22 0 top
U$290  [#A1#4]  63.37,141.22 0 bottom
U$291  [#D0#1]  63.37,148.84 0 bottom
U$292  [#D0#1]  60.07,148.84 0 top
U$293  [#D1#0]  60.2,151.38 0 top
U$294  [#D1#0]  63.25,151.38 0 bottom
U$295  [#PWM0#3]  57.53,143.76 0 top
U$296  [#PWM0#3]  63.5,143.76 0 bottom
U$297  [#PWM1#2]  57.78,146.3 0 top
U$298  [#PWM1#2]  63.37,146.3 0 bottom
U$299  [#GND#0]  66.55,152.15 90 top
U$300  [#GND#0]  66.55,156.59 270 bottom
U$301  [#3V3#1]  61.72,133.6 0 top
U$302  [#3V3#1]  66.17,133.6 0 bottom
U$303  [#GND#0]  61.59,136.14 0 top
U$304  [#GND#0]  66.04,136.14 0 bottom
U$305  [#SCL#3]  61.85,128.52 0 top
U$306  [#SCL#3]  65.91,128.52 0 bottom
U$307  [#SDA#2]  61.59,131.06 0 top
U$308  [#SDA#2]  66.04,131.06 0 bottom
U$309  [3V37]  54.23,113.16 0 top
U$310  [22223]  48.89,122.05 0 top
U$311  [ACCEL4]  40.77,125.6 0 top
U$312  [BOOT5]  41.27,113.41 0 top
U$313  [RESET6]  30.86,113.41 0 top
U$314  [VIN8]  58.29,113.16 0 top
U$315  [X1]  49.28,114.55 0 top
U$316  [Y2]  52.45,117.73 0 top
U$317  [Z0]  47.62,117.73 0 top
U$318  [#EN1#3]  37.47,132.97 0 top
U$319  [#EN2#4]  46.99,132.97 0 top
U$320  [#MEAS#2]  17.27,116.46 0 top
U$321  [SWD0]  22.1,130.05 90 top
U$322  [#BYP#1]  13.97,132.33 0 top
U$323  [MICS0]  42.04,135.13 0 top
U$324  [#RST#1]  32,115.82 0 bottom
U$325  [#VE#0]  34.04,120.52 0 bottom
U$326  [#I�C#0]  56.9,120.4 90 top
U$327  [MACHINE0]  25.65,147.7 0 top
U$328  [LEARNING1]  25.15,145.54 0 top
U$329  [CAMERA0]  26.29,157.86 0 top
U$330  [FACE_UP0]  28.83,156.21 0 top
U$331  [#3V3#0]  51.69,114.55 0 bottom
U$332  [#VIN#1]  59.31,114.55 0 bottom
U$333  [MICROSD0]  46.23,145.03 0 top
U$334  [LEARNING1]  39.37,134.87 0 bottom
U$335  [MACHINE0]  50.42,134.87 0 bottom
U$336  [MICROMOD_LOGO_.35]  94.49,149.99 0 top
U$337  [MICROMOD_LOGO_.35]  98.81,137.41 0 bottom
U$338  [##CS##3]  72.77,146.3 0 top
U$339  [##CS##3]  76.07,146.3 0 bottom
U$340  [#CIPO#2]  77.6,148.72 0 bottom
U$341  [#CIPO#2]  72.77,148.72 0 top
U$342  [#COPI#1]  72.77,151.38 0 top
U$343  [#COPI#1]  77.72,151.38 0 bottom
U$344  [#GND#4]  72.64,143.76 0 top
U$345  [#GND#4]  77.09,143.76 0 bottom
U$346  [#RX1#6]  72.77,138.68 0 top
U$347  [#RX1#6]  76.83,138.68 0 bottom
U$348  [#SCK#0]  72.77,153.92 0 top
U$349  [#SCK#0]  76.96,153.92 0 bottom
U$350  [#TX1#5]  72.77,141.22 0 top
U$351  [#TX1#5]  76.96,141.22 0 bottom
U$352  [#GND#4]  72.64,136.14 0 top
U$353  [#GND#4]  77.09,136.14 0 bottom
U$354  [#A0#5]  121.41,138.68 0 top
U$355  [#A0#5]  124.84,138.68 0 bottom
U$356  [#A1#4]  121.67,141.22 0 top
U$357  [#A1#4]  124.84,141.22 0 bottom
U$358  [#D0#1]  124.84,148.84 0 bottom
U$359  [#D0#1]  121.54,148.84 0 top
U$360  [#D1#0]  121.67,151.38 0 top
U$361  [#D1#0]  124.71,151.38 0 bottom
U$362  [#PWM0#3]  119,143.76 0 top
U$363  [#PWM0#3]  124.97,143.76 0 bottom
U$364  [#PWM1#2]  119.25,146.3 0 top
U$365  [#PWM1#2]  124.84,146.3 0 bottom
U$366  [#GND#0]  128.02,152.15 90 top
U$367  [#GND#0]  128.02,156.59 270 bottom
U$368  [#3V3#1]  123.19,133.6 0 top
U$369  [#3V3#1]  127.63,133.6 0 bottom
U$370  [#GND#0]  123.06,136.14 0 top
U$371  [#GND#0]  127.51,136.14 0 bottom
U$372  [#SCL#3]  123.32,128.52 0 top
U$373  [#SCL#3]  127.38,128.52 0 bottom
U$374  [#SDA#2]  123.06,131.06 0 top
U$375  [#SDA#2]  127.51,131.06 0 bottom
U$376  [3V37]  115.7,113.16 0 top
U$377  [22223]  110.36,122.05 0 top
U$378  [ACCEL4]  102.23,125.6 0 top
U$379  [BOOT5]  102.74,113.41 0 top
U$380  [RESET6]  92.33,113.41 0 top
U$381  [VIN8]  119.76,113.16 0 top
U$382  [X1]  110.74,114.55 0 top
U$383  [Y2]  113.92,117.73 0 top
U$384  [Z0]  109.09,117.73 0 top
U$385  [#EN1#3]  98.93,132.97 0 top
U$386  [#EN2#4]  108.46,132.97 0 top
U$387  [#MEAS#2]  78.74,116.46 0 top
U$388  [SWD0]  83.57,130.05 90 top
U$389  [#BYP#1]  75.44,132.33 0 top
U$390  [MICS0]  103.5,135.13 0 top
U$391  [#RST#1]  93.47,115.82 0 bottom
U$392  [#VE#0]  95.5,120.52 0 bottom
U$393  [#I�C#0]  118.36,120.4 90 top
U$394  [MACHINE0]  87.12,147.7 0 top
U$395  [LEARNING1]  86.61,145.54 0 top
U$396  [CAMERA0]  87.76,157.86 0 top
U$397  [FACE_UP0]  90.3,156.21 0 top
U$398  [#3V3#0]  113.16,114.55 0 bottom
U$399  [#VIN#1]  120.78,114.55 0 bottom
U$400  [MICROSD0]  107.7,145.03 0 top
U$401  [LEARNING1]  100.84,134.87 0 bottom
U$402  [MACHINE0]  111.89,134.87 0 bottom
VE  [SMT-JUMPER_2_NO_SILK]  34.8,15.37 0 bottom
VE1  [SMT-JUMPER_2_NO_SILK]  96.27,15.37 0 bottom
VE2  [SMT-JUMPER_2_NO_SILK]  34.8,67.95 0 bottom
VE3  [SMT-JUMPER_2_NO_SILK]  96.27,67.95 0 bottom
VE4  [SMT-JUMPER_2_NO_SILK]  34.8,120.52 0 bottom
VE5  [SMT-JUMPER_2_NO_SILK]  96.27,120.52 0 bottom
VIN_LED  [SMT-JUMPER_2_NC_TRACE_SILK]  60.2,9.4 0 bottom
VIN_LED1  [SMT-JUMPER_2_NC_TRACE_SILK]  121.67,9.4 0 bottom
VIN_LED2  [SMT-JUMPER_2_NC_TRACE_SILK]  60.2,61.98 0 bottom
VIN_LED3  [SMT-JUMPER_2_NC_TRACE_SILK]  121.67,61.98 0 bottom
VIN_LED4  [SMT-JUMPER_2_NC_TRACE_SILK]  60.2,114.55 0 bottom
VIN_LED5  [SMT-JUMPER_2_NC_TRACE_SILK]  121.67,114.55 0 bottom

## Library data of the parts
3V3_LED 3V3_LED1-3V3_LED5 BYP BYP1-BYP5 EN1-EN12 JP1-JP6 MEAS MEAS1-MEAS5 VE VE1-VE5 VIN_LED VIN_LED1-VIN_LED5 = SparkFun-Jumpers
BT1-BT6 = SparkFun-Batteries; PROD_ID: BATT-14267
C1 C4 C8-C11 C17 C21 C24-C26 C30 C31 C34 C38-C41 C46 C47 C51-C54 C59 C63-C66 C71 = SparkFun-Capacitors; PROD_ID: CAP-00810
C2 C12 C27 C42 C55 C67 = SparkFun-Capacitors; PROD_ID: CAP-00811
C3 C7 C14 C16 C20 C22 C28 C29 C33 C37 C43 C45 C50 C56 C58 C62 C68 C70 = SparkFun-Capacitors; PROD_ID: CAP-00868
C5 C6 C13 C18 C19 C35 C36 C48 C49 C60 C61 C72 = SparkFun-Capacitors; PROD_ID: CAP-07822
C15 C23 C32 C44 C57 C69 = SparkFun-Capacitors; PROD_ID: CAP-08390
D1 D7 D12 D17 D22 D27 = SparkFun-DiscreteSemi; PROD_ID: DIO-11284
D2 D8 D13 D18 D23 D28 = SparkFun-LED; PROD_ID: DIO-00819
D3 D9 D14 D19 D24 D29 = SparkFun-DiscreteSemi; PROD_ID: DIO-14829
D4 D10 D15 D20 D25 D30 = SparkFun-LED; PROD_ID: DIO-09003
D5 D6 D11 D16 D21 D26 = SparkFun-DiscreteSemi; PROD_ID: DIO-14072
E1 E3 E5 E7 E9 E11 = SparkFun-Sensors; PROD_ID: IC-14361
E2 E4 E6 E8 E10 E12 = Teensy; PROD_ID: COMP-14898
E$1-E$4 FD1-FD24 LOGO1-LOGO24 = SparkFun-Aesthetics
E$5 E$6 = SparkFun-Retired
F1-F6 = SparkFun-Fuses; PROD_ID: RES-14313
H1-H4 H6-H9 H11-H14 H16-H19 H21-H24 H26-H29 = SparkFun-Hardware
H5 H10 H15 H20 H25 H30 = SparkFun-Hardware; PROD_ID: HW-14899
J1 J12 J25 J37 J49 J61 = SparkFun-Connectors; PROD_ID: CONN-14122
J2 J5-J10 J13 J14 J16-J19 J21 J22 J24 J26 J28-J31 J33 J34 J36 J38 J40-J43 J45 J46 J48 J50 J52-J55 J57 J58 J60 J62 J64-J67 J69 J70 J72 TP1-TP5 TP7 = SparkFun-Connectors
J3 J15 J27 J39 J51 J63 = SparkFun-Connectors; PROD_ID: CONN-13694
J4 J23 J35 J47 J59 J71 = SparkFun-MicroMod; PROD_ID: CONN-14877
J11 J20 J32 J44 J56 J68 = SparkFun-Connectors; PROD_ID: CONN-07820
R1 R4 R14 R15 R24 R25 R34 R35 R44 R45 R54 R55 = SparkFun-Resistors; PROD_ID: RES-08272
R2 R3 R7 R12 R21 R22 R31 R32 R41 R42 R51 R52 = SparkFun-Resistors; PROD_ID: RES-12083
R5 R18 R28 R38 R48 R58 = SparkFun-Resistors; PROD_ID: RES-07828
R6 R20 R30 R40 R50 R60 = SparkFun-Resistors; PROD_ID: RES-07857
R8 R13 R23 R33 R43 R53 = SparkFun-Resistors; PROD_ID: RES-07851
R9 R16 R26 R36 R46 R56 = SparkFun-Resistors; PROD_ID: RES-00824
R10 R17 R27 R37 R47 R57 = SparkFun-Resistors; PROD_ID: RES-09383
R11 R19 R29 R39 R49 R59 = SparkFun-Resistors; PROD_ID: RES-07856
S1-S12 = SparkFun-Switches; PROD_ID: SWCH-14139
U1 U5 U7 U10 U13 U16 = SparkFun-IC-Power; PROD_ID: VREG-14094
U2 U4 U8 U11 U14 U17 = SparkFun-Sensors; DIGIKEY: 497-14851-2-ND; PROD_ID: IC-14229
U3 U6 U9 U12 U15 U18 = SparkFun-IC-Power; PROD_ID: VREG-14239
U$1-U$23 U$25-U$33 U$35-U$52 U$55-U$134 U$137-U$201 U$204-U$268 U$271-U$335 U$338-U$402 = output
U$24 U$34 U$53 U$54 U$135 U$136 U$202 U$203 U$269 U$270 U$336 U$337 = SparkFun-MicroMod